# Altium PCB Pedal_WS2812_old.PcbDoc
Units mil, origin at the board's own origin, x right, y up, seen from the top; angles counter-clockwise.
Board outline 2244.09 x 2283.46 mil, 2 copper layers (Top Layer, Bottom Layer); 168 components, 0 nets, 681 pads, 0 vias.
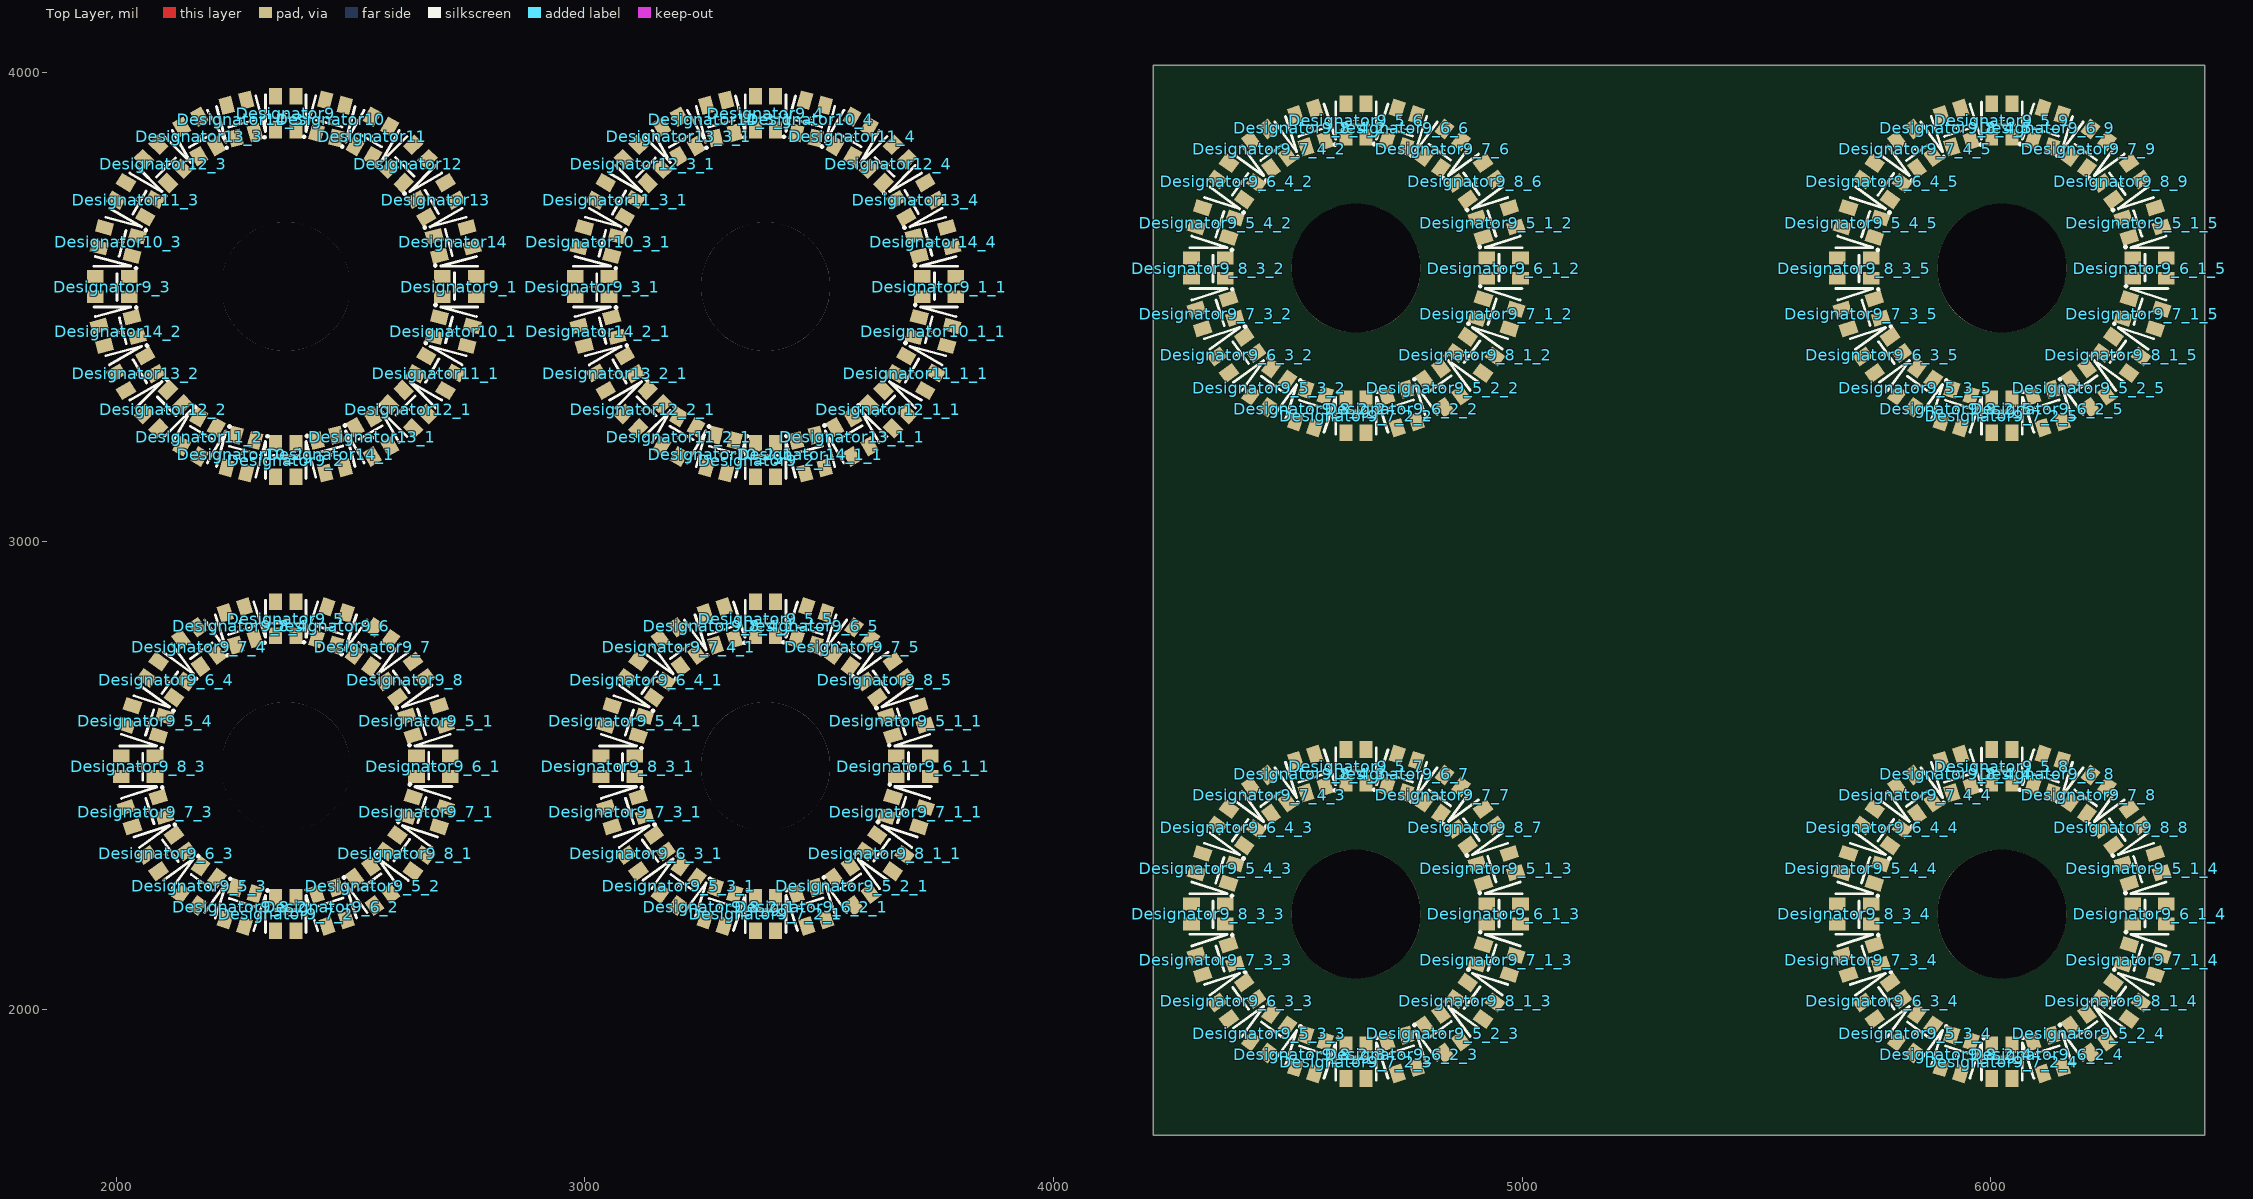
[diagram p0: Top Layer view]
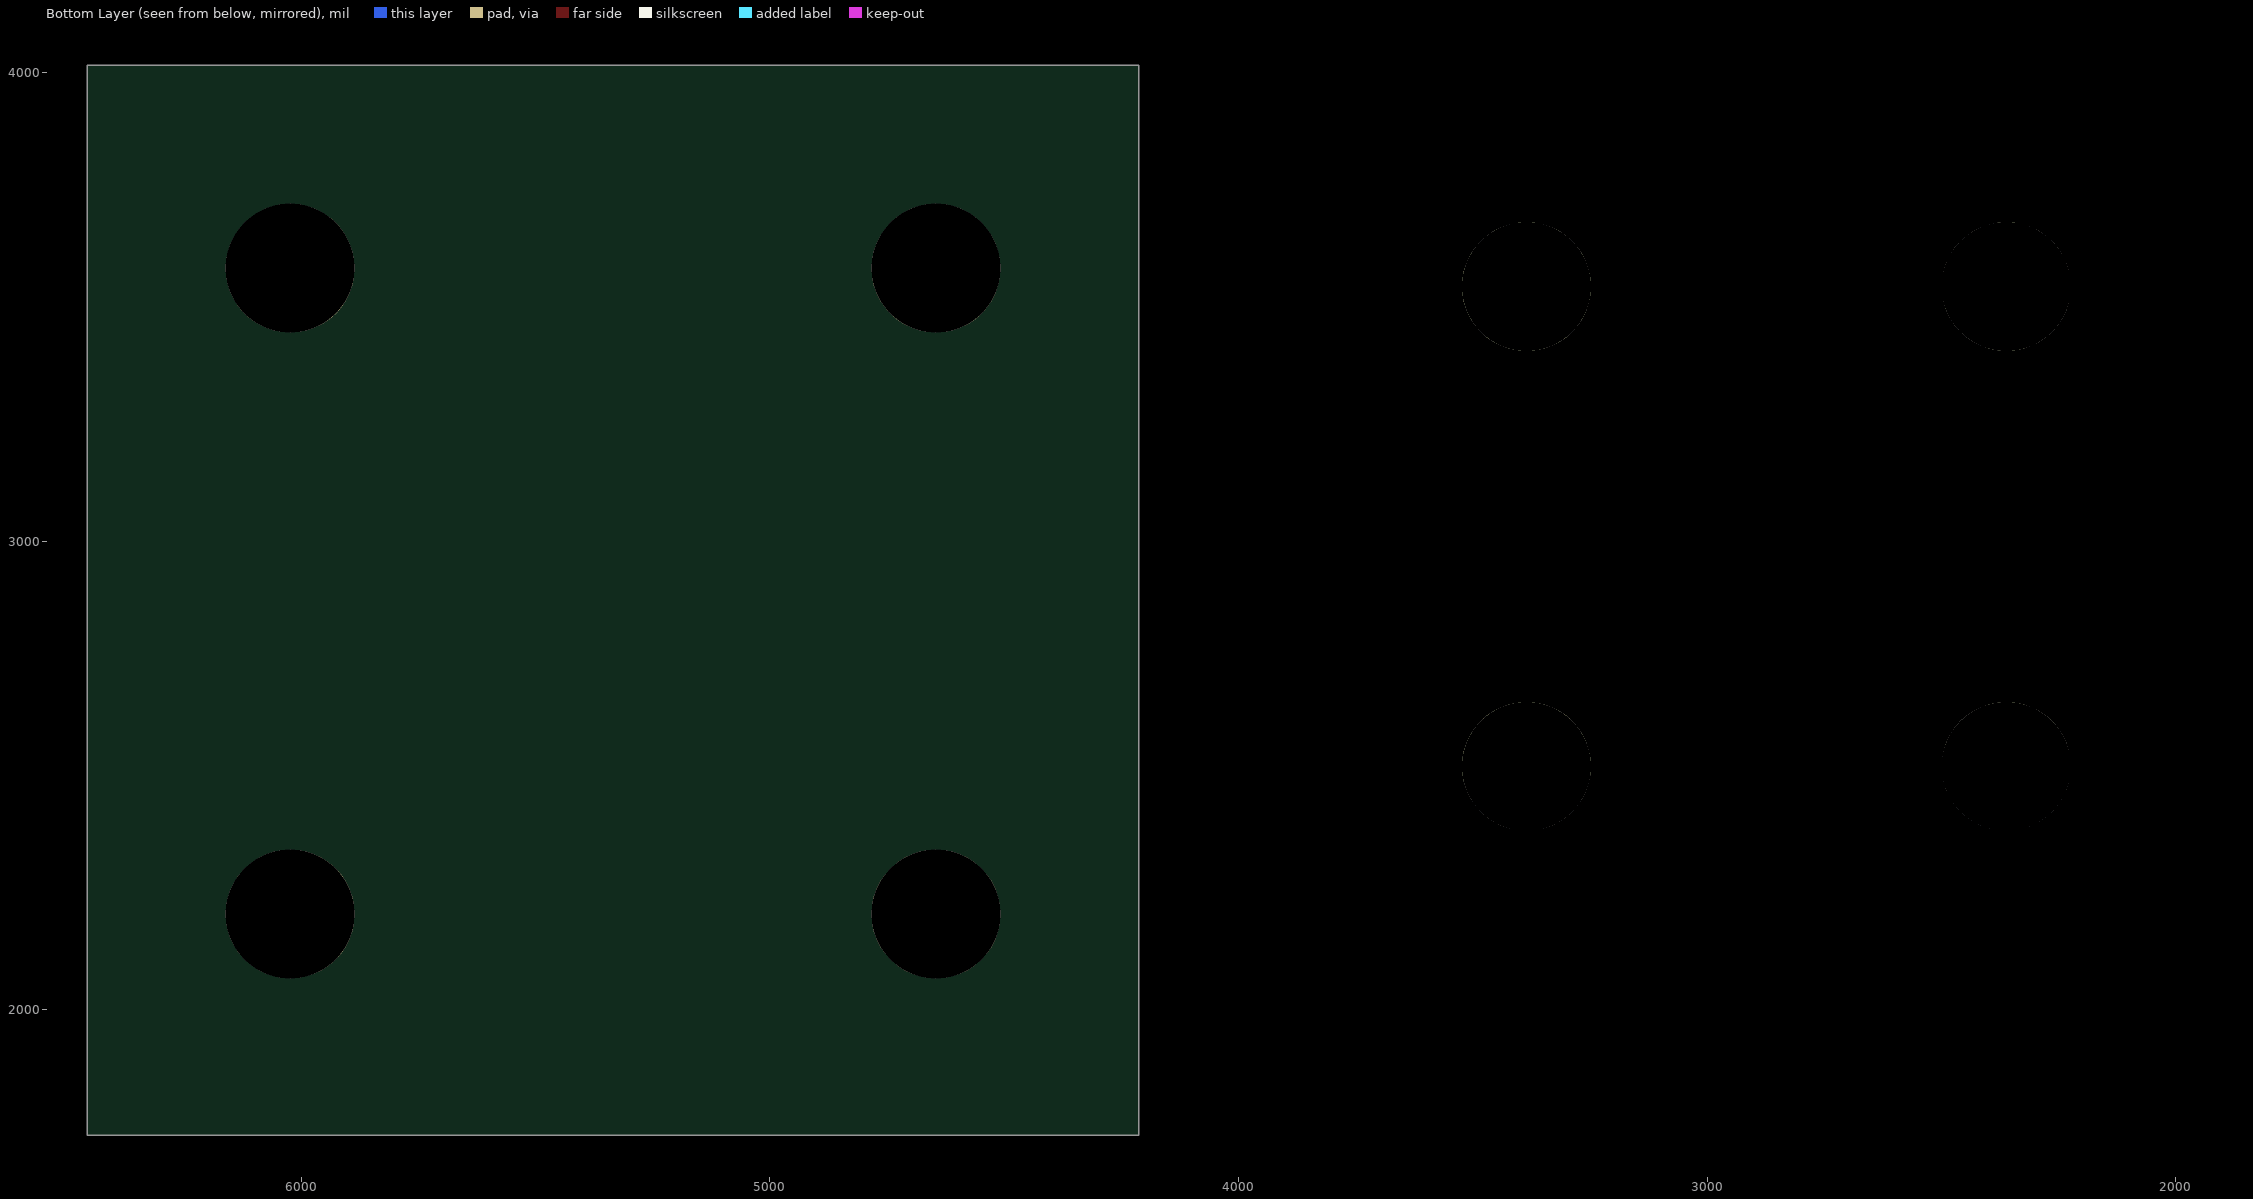
[diagram p1: Bottom Layer view, seen from below]

## Layer stack, top to bottom
Top Solder: solder mask 0.4, Solder Resist, Dk 3.5
Top Layer: signal copper 1.4
Dielectric 1: dielectric 12.6, FR-4, Dk 4.8
Bottom Layer: signal copper 1.4
Bottom Solder: solder mask 0.4, Solder Resist, Dk 3.5

## Board outline
4212.6,1732.28 4212.6,4015.75 6456.69,4015.75 6456.69,1732.28

## Design rules (kind name [scope] priority, off if disabled: settings)
Clearance [All] p1: gap=10 ignorepadtopadclearanceinfootprint=FALSE
PolygonConnect [All] p1: connectstyle=Relief reliefconductorwidth=10 reliefentries=4 polygonreliefangle="90 Angle" airgapwidth=10
RoutingVias [All] p1: holewidth=28 width=50 viastyle="Through Hole" minholewidth=28 minwidth=50 maxholewidth=28 maxwidth=50
SolderMaskExpansion [All] p1: expansion=4 istentingtop=FALSE
Width [All] p1: maxlimit=10 minlimit=10 preferedwidth=10
30 further rules are at their usual default settings.

## Components (designator, comment, footprint, x,y, rotation, side; value= is the part's Value field where it differs from the comment)
Designator9 "Comment" WS2812_2020 2362.2,3913.39 r90 top
Designator9_1 "Comment" WS2812_2020 2732.28,3543.31 r0 top
Designator9_1_1 "Comment" WS2812_2020 3755.91,3543.31 r0 top
Designator9_2 "Comment" WS2812_2020 2362.2,3173.23 r270 top
Designator9_2_1 "Comment" WS2812_2020 3385.83,3173.23 r270 top
Designator9_3 "Comment" WS2812_2020 1992.13,3543.31 r180 top
Designator9_3_1 "Comment" WS2812_2020 3015.75,3543.31 r180 top
Designator9_4 "Comment" WS2812_2020 3385.83,3913.39 r90 top
Designator9_5 "Comment" WS2812_2020 2362.2,2834.65 r90 top
Designator9_5_1 "Comment" WS2812_2020 2661.75,2617.01 r18 top
Designator9_5_1_1 "Comment" WS2812_2020 3685.37,2617.01 r18 top
Designator9_5_1_2 "Comment" WS2812_2020 4945.21,3680.01 r18 top
Designator9_5_1_3 "Comment" WS2812_2020 4945.21,2302.05 r18 top
Designator9_5_1_4 "Comment" WS2812_2020 6323.17,2302.05 r18 top
Designator9_5_1_5 "Comment" WS2812_2020 6323.17,3680.01 r18 top
Designator9_5_2 "Comment" WS2812_2020 2547.33,2264.88 r306 top
Designator9_5_2_1 "Comment" WS2812_2020 3570.96,2264.88 r306 top
Designator9_5_2_2 "Comment" WS2812_2020 4830.8,3327.87 r306 top
Designator9_5_2_3 "Comment" WS2812_2020 4830.8,1949.92 r306 top
Designator9_5_2_4 "Comment" WS2812_2020 6208.75,1949.92 r306 top
Designator9_5_2_5 "Comment" WS2812_2020 6208.75,3327.87 r306 top
Designator9_5_3 "Comment" WS2812_2020 2177.08,2264.88 r234 top
Designator9_5_3_1 "Comment" WS2812_2020 3200.7,2264.88 r234 top
Designator9_5_3_2 "Comment" WS2812_2020 4460.54,3327.87 r234 top
Designator9_5_3_3 "Comment" WS2812_2020 4460.54,1949.92 r234 top
Designator9_5_3_4 "Comment" WS2812_2020 5838.49,1949.92 r234 top
Designator9_5_3_5 "Comment" WS2812_2020 5838.49,3327.87 r234 top
Designator9_5_4 "Comment" WS2812_2020 2062.66,2617.01 r162 top
Designator9_5_4_1 "Comment" WS2812_2020 3086.28,2617.01 r162 top
Designator9_5_4_2 "Comment" WS2812_2020 4346.12,3680.01 r162 top
Designator9_5_4_3 "Comment" WS2812_2020 4346.12,2302.05 r162 top
Designator9_5_4_4 "Comment" WS2812_2020 5724.08,2302.05 r162 top
Designator9_5_4_5 "Comment" WS2812_2020 5724.08,3680.01 r162 top
Designator9_5_5 "Comment" WS2812_2020 3385.83,2834.65 r90 top
Designator9_5_6 "Comment" WS2812_2020 4645.67,3897.64 r90 top
Designator9_5_7 "Comment" WS2812_2020 4645.67,2519.68 r90 top
Designator9_5_8 "Comment" WS2812_2020 6023.62,2519.68 r90 top
Designator9_5_9 "Comment" WS2812_2020 6023.62,3897.64 r90 top
Designator9_6 "Comment" WS2812_2020 2459.53,2819.23 r72 top
Designator9_6_1 "Comment" WS2812_2020 2677.17,2519.68 r0 top
Designator9_6_1_1 "Comment" WS2812_2020 3700.79,2519.68 r0 top
Designator9_6_1_2 "Comment" WS2812_2020 4960.63,3582.68 r0 top
Designator9_6_1_3 "Comment" WS2812_2020 4960.63,2204.72 r0 top
Designator9_6_1_4 "Comment" WS2812_2020 6338.58,2204.72 r0 top
Designator9_6_1_5 "Comment" WS2812_2020 6338.58,3582.68 r0 top
Designator9_6_2 "Comment" WS2812_2020 2459.53,2220.14 r288 top
Designator9_6_2_1 "Comment" WS2812_2020 3483.15,2220.14 r288 top
Designator9_6_2_2 "Comment" WS2812_2020 4743,3283.13 r288 top
Designator9_6_2_3 "Comment" WS2812_2020 4743,1905.18 r288 top
Designator9_6_2_4 "Comment" WS2812_2020 6120.95,1905.18 r288 top
Designator9_6_2_5 "Comment" WS2812_2020 6120.95,3283.13 r288 top
Designator9_6_3 "Comment" WS2812_2020 2107.4,2334.56 r216 top
Designator9_6_3_1 "Comment" WS2812_2020 3131.02,2334.56 r216 top
Designator9_6_3_2 "Comment" WS2812_2020 4390.86,3397.55 r216 top
Designator9_6_3_3 "Comment" WS2812_2020 4390.86,2019.6 r216 top
Designator9_6_3_4 "Comment" WS2812_2020 5768.81,2019.6 r216 top
Designator9_6_3_5 "Comment" WS2812_2020 5768.81,3397.55 r216 top
Designator9_6_4 "Comment" WS2812_2020 2107.4,2704.81 r144 top
Designator9_6_4_1 "Comment" WS2812_2020 3131.02,2704.81 r144 top
Designator9_6_4_2 "Comment" WS2812_2020 4390.86,3767.81 r144 top
Designator9_6_4_3 "Comment" WS2812_2020 4390.86,2389.85 r144 top
Designator9_6_4_4 "Comment" WS2812_2020 5768.81,2389.85 r144 top
Designator9_6_4_5 "Comment" WS2812_2020 5768.81,3767.81 r144 top
Designator9_6_5 "Comment" WS2812_2020 3483.16,2819.23 r72 top
Designator9_6_6 "Comment" WS2812_2020 4743,3882.22 r72 top
Designator9_6_7 "Comment" WS2812_2020 4743,2504.27 r72 top
Designator9_6_8 "Comment" WS2812_2020 6120.95,2504.27 r72 top
Designator9_6_9 "Comment" WS2812_2020 6120.95,3882.22 r72 top
Designator9_7 "Comment" WS2812_2020 2547.33,2774.49 r54 top
Designator9_7_1 "Comment" WS2812_2020 2661.75,2422.36 r342 top
Designator9_7_1_1 "Comment" WS2812_2020 3685.37,2422.36 r342 top
Designator9_7_1_2 "Comment" WS2812_2020 4945.21,3485.35 r342 top
Designator9_7_1_3 "Comment" WS2812_2020 4945.21,2107.4 r342 top
Designator9_7_1_4 "Comment" WS2812_2020 6323.17,2107.4 r342 top
Designator9_7_1_5 "Comment" WS2812_2020 6323.17,3485.35 r342 top
Designator9_7_2 "Comment" WS2812_2020 2362.2,2204.72 r270 top
Designator9_7_2_1 "Comment" WS2812_2020 3385.83,2204.72 r270 top
Designator9_7_2_2 "Comment" WS2812_2020 4645.67,3267.72 r270 top
Designator9_7_2_3 "Comment" WS2812_2020 4645.67,1889.76 r270 top
Designator9_7_2_4 "Comment" WS2812_2020 6023.62,1889.76 r270 top
Designator9_7_2_5 "Comment" WS2812_2020 6023.62,3267.72 r270 top
Designator9_7_3 "Comment" WS2812_2020 2062.66,2422.36 r198 top
Designator9_7_3_1 "Comment" WS2812_2020 3086.28,2422.36 r198 top
Designator9_7_3_2 "Comment" WS2812_2020 4346.12,3485.35 r198 top
Designator9_7_3_3 "Comment" WS2812_2020 4346.12,2107.4 r198 top
Designator9_7_3_4 "Comment" WS2812_2020 5724.08,2107.4 r198 top
Designator9_7_3_5 "Comment" WS2812_2020 5724.08,3485.35 r198 top
Designator9_7_4 "Comment" WS2812_2020 2177.08,2774.49 r126 top
Designator9_7_4_1 "Comment" WS2812_2020 3200.7,2774.49 r126 top
Designator9_7_4_2 "Comment" WS2812_2020 4460.54,3837.49 r126 top
Designator9_7_4_3 "Comment" WS2812_2020 4460.54,2459.53 r126 top
Designator9_7_4_4 "Comment" WS2812_2020 5838.49,2459.53 r126 top
Designator9_7_4_5 "Comment" WS2812_2020 5838.49,3837.49 r126 top
Designator9_7_5 "Comment" WS2812_2020 3570.96,2774.49 r54 top
Designator9_7_6 "Comment" WS2812_2020 4830.8,3837.49 r54 top
Designator9_7_7 "Comment" WS2812_2020 4830.8,2459.53 r54 top
Designator9_7_8 "Comment" WS2812_2020 6208.75,2459.53 r54 top
Designator9_7_9 "Comment" WS2812_2020 6208.75,3837.49 r54 top
Designator9_8 "Comment" WS2812_2020 2617.01,2704.81 r36 top
Designator9_8_1 "Comment" WS2812_2020 2617.01,2334.56 r324 top
Designator9_8_1_1 "Comment" WS2812_2020 3640.64,2334.56 r324 top
Designator9_8_1_2 "Comment" WS2812_2020 4900.48,3397.55 r324 top
Designator9_8_1_3 "Comment" WS2812_2020 4900.48,2019.6 r324 top
Designator9_8_1_4 "Comment" WS2812_2020 6278.43,2019.6 r324 top
Designator9_8_1_5 "Comment" WS2812_2020 6278.43,3397.55 r324 top
Designator9_8_2 "Comment" WS2812_2020 2264.88,2220.14 r252 top
Designator9_8_2_1 "Comment" WS2812_2020 3288.5,2220.14 r252 top
Designator9_8_2_2 "Comment" WS2812_2020 4548.34,3283.13 r252 top
Designator9_8_2_3 "Comment" WS2812_2020 4548.34,1905.18 r252 top
Designator9_8_2_4 "Comment" WS2812_2020 5926.29,1905.18 r252 top
Designator9_8_2_5 "Comment" WS2812_2020 5926.29,3283.13 r252 top
Designator9_8_3 "Comment" WS2812_2020 2047.24,2519.68 r180 top
Designator9_8_3_1 "Comment" WS2812_2020 3070.87,2519.68 r180 top
Designator9_8_3_2 "Comment" WS2812_2020 4330.71,3582.68 r180 top
Designator9_8_3_3 "Comment" WS2812_2020 4330.71,2204.72 r180 top
Designator9_8_3_4 "Comment" WS2812_2020 5708.66,2204.72 r180 top
Designator9_8_3_5 "Comment" WS2812_2020 5708.66,3582.68 r180 top
Designator9_8_4 "Comment" WS2812_2020 2264.88,2819.23 r108 top
Designator9_8_4_1 "Comment" WS2812_2020 3288.5,2819.23 r108 top
Designator9_8_4_2 "Comment" WS2812_2020 4548.34,3882.22 r108 top
Designator9_8_4_3 "Comment" WS2812_2020 4548.34,2504.27 r108 top
Designator9_8_4_4 "Comment" WS2812_2020 5926.29,2504.27 r108 top
Designator9_8_4_5 "Comment" WS2812_2020 5926.29,3882.22 r108 top
Designator9_8_5 "Comment" WS2812_2020 3640.64,2704.81 r36 top
Designator9_8_6 "Comment" WS2812_2020 4900.48,3767.81 r36 top
Designator9_8_7 "Comment" WS2812_2020 4900.48,2389.85 r36 top
Designator9_8_8 "Comment" WS2812_2020 6278.43,2389.85 r36 top
Designator9_8_9 "Comment" WS2812_2020 6278.43,3767.81 r36 top
Designator10 "Comment" WS2812_2020 2457.97,3900.7 r75 top
Designator10_1 "Comment" WS2812_2020 2719.6,3447.54 r345 top
Designator10_1_1 "Comment" WS2812_2020 3743.22,3447.54 r345 top
Designator10_2 "Comment" WS2812_2020 2266.44,3185.91 r255 top
Designator10_2_1 "Comment" WS2812_2020 3290.06,3185.91 r255 top
Designator10_3 "Comment" WS2812_2020 2004.81,3639.07 r165 top
Designator10_3_1 "Comment" WS2812_2020 3028.43,3639.07 r165 top
Designator10_4 "Comment" WS2812_2020 3481.59,3900.7 r75 top
Designator11 "Comment" WS2812_2020 2547.2,3863.74 r60 top
Designator11_1 "Comment" WS2812_2020 2682.63,3358.31 r330 top
Designator11_1_1 "Comment" WS2812_2020 3706.26,3358.31 r330 top
Designator11_2 "Comment" WS2812_2020 2177.2,3222.88 r240 top
Designator11_2_1 "Comment" WS2812_2020 3200.83,3222.88 r240 top
Designator11_3 "Comment" WS2812_2020 2041.78,3728.31 r150 top
Designator11_3_1 "Comment" WS2812_2020 3065.4,3728.31 r150 top
Designator11_4 "Comment" WS2812_2020 3570.83,3863.74 r60 top
Designator12 "Comment" WS2812_2020 2623.83,3804.94 r45 top
Designator12_1 "Comment" WS2812_2020 2623.83,3281.68 r315 top
Designator12_1_1 "Comment" WS2812_2020 3647.46,3281.68 r315 top
Designator12_2 "Comment" WS2812_2020 2100.58,3281.68 r225 top
Designator12_2_1 "Comment" WS2812_2020 3124.2,3281.68 r225 top
Designator12_3 "Comment" WS2812_2020 2100.58,3804.94 r135 top
Designator12_3_1 "Comment" WS2812_2020 3124.2,3804.94 r135 top
Designator12_4 "Comment" WS2812_2020 3647.46,3804.94 r45 top
Designator13 "Comment" WS2812_2020 2682.63,3728.31 r30 top
Designator13_1 "Comment" WS2812_2020 2547.2,3222.88 r300 top
Designator13_1_1 "Comment" WS2812_2020 3570.83,3222.88 r300 top
Designator13_2 "Comment" WS2812_2020 2041.78,3358.31 r210 top
Designator13_2_1 "Comment" WS2812_2020 3065.4,3358.31 r210 top
Designator13_3 "Comment" WS2812_2020 2177.2,3863.74 r120 top
Designator13_3_1 "Comment" WS2812_2020 3200.83,3863.74 r120 top
Designator13_4 "Comment" WS2812_2020 3706.26,3728.31 r30 top
Designator14 "Comment" WS2812_2020 2719.6,3639.07 r15 top
Designator14_1 "Comment" WS2812_2020 2457.97,3185.91 r285 top
Designator14_1_1 "Comment" WS2812_2020 3481.59,3185.91 r285 top
Designator14_2 "Comment" WS2812_2020 2004.81,3447.54 r195 top
Designator14_2_1 "Comment" WS2812_2020 3028.43,3447.54 r195 top
Designator14_3 "Comment" WS2812_2020 2266.44,3900.7 r105 top
Designator14_3_1 "Comment" WS2812_2020 3290.06,3900.7 r105 top
Designator14_4 "Comment" WS2812_2020 3743.22,3639.07 r15 top

## Footprints (in the part's own frame and the unit in brackets; to place one, negate y for a bottom-side part, rotate by r counter-clockwise, add the part's x,y. Pads: shape width x height; smd on the part's side, far side on the other; paste and mask are expansions set on the pad)
WS2812_2020 [mm]
  rect 0.9x0.7 smd: 1(-0.915,0.55) 2(-0.915,-0.55) 3(0.915,-0.55) 4(0.915,0.55)
  silkscreen extent -1.3,-1.1 1,1.15, body extent -1.09,-0.98 1.11,1.02, height 0.86

## Free pads (board coordinates)
  round 275 hole 275.59 mask+2.36: NC(2362.2,2519.68) NC(2362.2,3543.31) NC(3385.83,2519.68) NC(3385.83,3543.31) NC(3385.83,3543.31) NC(4645.67,2204.72) NC(4645.67,3582.68) NC(6023.62,3582.68) NC(6023.62,2204.72)

## Nets (pads, with @x,y where several pads share a name; then routed paths per layer and width w, separated by ;. In a path a pad name is that pad's centre, name@x,y a point inside that pad or via, vN(x,y) a via of type N, cw(c..) or ccw(c..) an arc to the next point about the centre after c; other vN are vias at no path point)
pads on no net: Designator9.1 Designator9.2 Designator9.3 Designator9.4 Designator9_1.1 Designator9_1.2 Designator9_1.3 Designator9_1.4 Designator9_1_1.1 Designator9_1_1.2 Designator9_1_1.3 Designator9_1_1.4 Designator9_2.1 Designator9_2.2 Designator9_2.3 Designator9_2.4 Designator9_2_1.1 Designator9_2_1.2 Designator9_2_1.3 Designator9_2_1.4 Designator9_3.1 Designator9_3.2 Designator9_3.3 Designator9_3.4 Designator9_3_1.1 Designator9_3_1.2 Designator9_3_1.3 Designator9_3_1.4 Designator9_4.1 Designator9_4.2 Designator9_4.3 Designator9_4.4 Designator9_5.1 Designator9_5.2 Designator9_5.3 Designator9_5.4 Designator9_5_1.1 Designator9_5_1.2 Designator9_5_1.3 Designator9_5_1.4 Designator9_5_1_1.1 Designator9_5_1_1.2 Designator9_5_1_1.3 Designator9_5_1_1.4 Designator9_5_1_2.1 Designator9_5_1_2.2 Designator9_5_1_2.3 Designator9_5_1_2.4 Designator9_5_1_3.1 Designator9_5_1_3.2 Designator9_5_1_3.3 Designator9_5_1_3.4 Designator9_5_1_4.1 Designator9_5_1_4.2 Designator9_5_1_4.3 Designator9_5_1_4.4 Designator9_5_1_5.1 Designator9_5_1_5.2 Designator9_5_1_5.3 Designator9_5_1_5.4 Designator9_5_2.1 Designator9_5_2.2 Designator9_5_2.3 Designator9_5_2.4 Designator9_5_2_1.1 Designator9_5_2_1.2 Designator9_5_2_1.3 Designator9_5_2_1.4 Designator9_5_2_2.1 Designator9_5_2_2.2 Designator9_5_2_2.3 Designator9_5_2_2.4 Designator9_5_2_3.1 Designator9_5_2_3.2 Designator9_5_2_3.3 Designator9_5_2_3.4 Designator9_5_2_4.1 Designator9_5_2_4.2 Designator9_5_2_4.3 Designator9_5_2_4.4 Designator9_5_2_5.1 Designator9_5_2_5.2 Designator9_5_2_5.3 Designator9_5_2_5.4 Designator9_5_3.1 Designator9_5_3.2 Designator9_5_3.3 Designator9_5_3.4 Designator9_5_3_1.1 Designator9_5_3_1.2 Designator9_5_3_1.3 Designator9_5_3_1.4 Designator9_5_3_2.1 Designator9_5_3_2.2 Designator9_5_3_2.3 Designator9_5_3_2.4 Designator9_5_3_3.1 Designator9_5_3_3.2 Designator9_5_3_3.3 Designator9_5_3_3.4 Designator9_5_3_4.1 Designator9_5_3_4.2 Designator9_5_3_4.3 Designator9_5_3_4.4 Designator9_5_3_5.1 Designator9_5_3_5.2 Designator9_5_3_5.3 Designator9_5_3_5.4 Designator9_5_4.1 Designator9_5_4.2 Designator9_5_4.3 Designator9_5_4.4 Designator9_5_4_1.1 Designator9_5_4_1.2 Designator9_5_4_1.3 Designator9_5_4_1.4 Designator9_5_4_2.1 Designator9_5_4_2.2 Designator9_5_4_2.3 Designator9_5_4_2.4 Designator9_5_4_3.1 Designator9_5_4_3.2 Designator9_5_4_3.3 Designator9_5_4_3.4 Designator9_5_4_4.1 Designator9_5_4_4.2 Designator9_5_4_4.3 Designator9_5_4_4.4 Designator9_5_4_5.1 Designator9_5_4_5.2 Designator9_5_4_5.3 Designator9_5_4_5.4 Designator9_5_5.1 Designator9_5_5.2 Designator9_5_5.3 Designator9_5_5.4 Designator9_5_6.1 Designator9_5_6.2 Designator9_5_6.3 Designator9_5_6.4 Designator9_5_7.1 Designator9_5_7.2 Designator9_5_7.3 Designator9_5_7.4 Designator9_5_8.1 Designator9_5_8.2 Designator9_5_8.3 Designator9_5_8.4 Designator9_5_9.1 Designator9_5_9.2 Designator9_5_9.3 Designator9_5_9.4 Designator9_6.1 Designator9_6.2 Designator9_6.3 Designator9_6.4 Designator9_6_1.1 Designator9_6_1.2 Designator9_6_1.3 Designator9_6_1.4 Designator9_6_1_1.1 Designator9_6_1_1.2 Designator9_6_1_1.3 Designator9_6_1_1.4 Designator9_6_1_2.1 Designator9_6_1_2.2 Designator9_6_1_2.3 Designator9_6_1_2.4 Designator9_6_1_3.1 Designator9_6_1_3.2 Designator9_6_1_3.3 Designator9_6_1_3.4 Designator9_6_1_4.1 Designator9_6_1_4.2 Designator9_6_1_4.3 Designator9_6_1_4.4 Designator9_6_1_5.1 Designator9_6_1_5.2 Designator9_6_1_5.3 Designator9_6_1_5.4 Designator9_6_2.1 Designator9_6_2.2 Designator9_6_2.3 Designator9_6_2.4 Designator9_6_2_1.1 Designator9_6_2_1.2 Designator9_6_2_1.3 Designator9_6_2_1.4 Designator9_6_2_2.1 Designator9_6_2_2.2 Designator9_6_2_2.3 Designator9_6_2_2.4 Designator9_6_2_3.1 Designator9_6_2_3.2 Designator9_6_2_3.3 Designator9_6_2_3.4 Designator9_6_2_4.1 Designator9_6_2_4.2 Designator9_6_2_4.3 Designator9_6_2_4.4 Designator9_6_2_5.1 Designator9_6_2_5.2 Designator9_6_2_5.3 Designator9_6_2_5.4 Designator9_6_3.1 Designator9_6_3.2 Designator9_6_3.3 Designator9_6_3.4 Designator9_6_3_1.1 Designator9_6_3_1.2 Designator9_6_3_1.3 Designator9_6_3_1.4 Designator9_6_3_2.1 Designator9_6_3_2.2 Designator9_6_3_2.3 Designator9_6_3_2.4 Designator9_6_3_3.1 Designator9_6_3_3.2 Designator9_6_3_3.3 Designator9_6_3_3.4 Designator9_6_3_4.1 Designator9_6_3_4.2 Designator9_6_3_4.3 Designator9_6_3_4.4 Designator9_6_3_5.1 Designator9_6_3_5.2 Designator9_6_3_5.3 Designator9_6_3_5.4 Designator9_6_4.1 Designator9_6_4.2 Designator9_6_4.3 Designator9_6_4.4 Designator9_6_4_1.1 Designator9_6_4_1.2 Designator9_6_4_1.3 Designator9_6_4_1.4 Designator9_6_4_2.1 Designator9_6_4_2.2 Designator9_6_4_2.3 Designator9_6_4_2.4 Designator9_6_4_3.1 Designator9_6_4_3.2 Designator9_6_4_3.3 Designator9_6_4_3.4 Designator9_6_4_4.1 Designator9_6_4_4.2 Designator9_6_4_4.3 Designator9_6_4_4.4 Designator9_6_4_5.1 Designator9_6_4_5.2 Designator9_6_4_5.3 Designator9_6_4_5.4 Designator9_6_5.1 Designator9_6_5.2 Designator9_6_5.3 Designator9_6_5.4 Designator9_6_6.1 Designator9_6_6.2 Designator9_6_6.3 Designator9_6_6.4 Designator9_6_7.1 Designator9_6_7.2 Designator9_6_7.3 Designator9_6_7.4 Designator9_6_8.1 Designator9_6_8.2 Designator9_6_8.3 Designator9_6_8.4 Designator9_6_9.1 Designator9_6_9.2 Designator9_6_9.3 Designator9_6_9.4 Designator9_7.1 Designator9_7.2 Designator9_7.3 Designator9_7.4 Designator9_7_1.1 Designator9_7_1.2 Designator9_7_1.3 Designator9_7_1.4 Designator9_7_1_1.1 Designator9_7_1_1.2 Designator9_7_1_1.3 Designator9_7_1_1.4 Designator9_7_1_2.1 Designator9_7_1_2.2 Designator9_7_1_2.3 Designator9_7_1_2.4 Designator9_7_1_3.1 Designator9_7_1_3.2 Designator9_7_1_3.3 Designator9_7_1_3.4 Designator9_7_1_4.1 Designator9_7_1_4.2 Designator9_7_1_4.3 Designator9_7_1_4.4 Designator9_7_1_5.1 Designator9_7_1_5.2 Designator9_7_1_5.3 Designator9_7_1_5.4 Designator9_7_2.1 Designator9_7_2.2 Designator9_7_2.3 Designator9_7_2.4 Designator9_7_2_1.1 Designator9_7_2_1.2 Designator9_7_2_1.3 Designator9_7_2_1.4 Designator9_7_2_2.1 Designator9_7_2_2.2 Designator9_7_2_2.3 Designator9_7_2_2.4 Designator9_7_2_3.1 Designator9_7_2_3.2 Designator9_7_2_3.3 Designator9_7_2_3.4 Designator9_7_2_4.1 Designator9_7_2_4.2 Designator9_7_2_4.3 Designator9_7_2_4.4 Designator9_7_2_5.1 Designator9_7_2_5.2 Designator9_7_2_5.3 Designator9_7_2_5.4 Designator9_7_3.1 Designator9_7_3.2 Designator9_7_3.3 Designator9_7_3.4 Designator9_7_3_1.1 Designator9_7_3_1.2 Designator9_7_3_1.3 Designator9_7_3_1.4 Designator9_7_3_2.1 Designator9_7_3_2.2 Designator9_7_3_2.3 Designator9_7_3_2.4 Designator9_7_3_3.1 Designator9_7_3_3.2 Designator9_7_3_3.3 Designator9_7_3_3.4 Designator9_7_3_4.1 Designator9_7_3_4.2 Designator9_7_3_4.3 Designator9_7_3_4.4 Designator9_7_3_5.1 Designator9_7_3_5.2 Designator9_7_3_5.3 Designator9_7_3_5.4 Designator9_7_4.1 Designator9_7_4.2 Designator9_7_4.3 Designator9_7_4.4 Designator9_7_4_1.1 Designator9_7_4_1.2 Designator9_7_4_1.3 Designator9_7_4_1.4 Designator9_7_4_2.1 Designator9_7_4_2.2 Designator9_7_4_2.3 Designator9_7_4_2.4 Designator9_7_4_3.1 Designator9_7_4_3.2 Designator9_7_4_3.3 Designator9_7_4_3.4 Designator9_7_4_4.1 Designator9_7_4_4.2 Designator9_7_4_4.3 Designator9_7_4_4.4 Designator9_7_4_5.1 Designator9_7_4_5.2 Designator9_7_4_5.3 Designator9_7_4_5.4 Designator9_7_5.1 Designator9_7_5.2 Designator9_7_5.3 Designator9_7_5.4 Designator9_7_6.1 Designator9_7_6.2 Designator9_7_6.3 Designator9_7_6.4 Designator9_7_7.1 Designator9_7_7.2 Designator9_7_7.3 Designator9_7_7.4 Designator9_7_8.1 Designator9_7_8.2 Designator9_7_8.3 Designator9_7_8.4 Designator9_7_9.1 Designator9_7_9.2 Designator9_7_9.3 Designator9_7_9.4 Designator9_8.1 Designator9_8.2 Designator9_8.3 Designator9_8.4 Designator9_8_1.1 Designator9_8_1.2 Designator9_8_1.3 Designator9_8_1.4 Designator9_8_1_1.1 Designator9_8_1_1.2 Designator9_8_1_1.3 Designator9_8_1_1.4 Designator9_8_1_2.1 Designator9_8_1_2.2 Designator9_8_1_2.3 Designator9_8_1_2.4 Designator9_8_1_3.1 Designator9_8_1_3.2 Designator9_8_1_3.3 Designator9_8_1_3.4 Designator9_8_1_4.1 Designator9_8_1_4.2 Designator9_8_1_4.3 Designator9_8_1_4.4 Designator9_8_1_5.1 Designator9_8_1_5.2 Designator9_8_1_5.3 Designator9_8_1_5.4 Designator9_8_2.1 Designator9_8_2.2 Designator9_8_2.3 Designator9_8_2.4 Designator9_8_2_1.1 Designator9_8_2_1.2 Designator9_8_2_1.3 Designator9_8_2_1.4 Designator9_8_2_2.1 Designator9_8_2_2.2 Designator9_8_2_2.3 Designator9_8_2_2.4 Designator9_8_2_3.1 Designator9_8_2_3.2 Designator9_8_2_3.3 Designator9_8_2_3.4 Designator9_8_2_4.1 Designator9_8_2_4.2 Designator9_8_2_4.3 Designator9_8_2_4.4 Designator9_8_2_5.1 Designator9_8_2_5.2 Designator9_8_2_5.3 Designator9_8_2_5.4 Designator9_8_3.1 Designator9_8_3.2 Designator9_8_3.3 Designator9_8_3.4 Designator9_8_3_1.1 Designator9_8_3_1.2 Designator9_8_3_1.3 Designator9_8_3_1.4 Designator9_8_3_2.1 Designator9_8_3_2.2 Designator9_8_3_2.3 Designator9_8_3_2.4 Designator9_8_3_3.1 Designator9_8_3_3.2 Designator9_8_3_3.3 Designator9_8_3_3.4 Designator9_8_3_4.1 Designator9_8_3_4.2 Designator9_8_3_4.3 Designator9_8_3_4.4 Designator9_8_3_5.1 Designator9_8_3_5.2 Designator9_8_3_5.3 Designator9_8_3_5.4 Designator9_8_4.1 Designator9_8_4.2 Designator9_8_4.3 Designator9_8_4.4 Designator9_8_4_1.1 Designator9_8_4_1.2 Designator9_8_4_1.3 Designator9_8_4_1.4 Designator9_8_4_2.1 Designator9_8_4_2.2 Designator9_8_4_2.3 Designator9_8_4_2.4 Designator9_8_4_3.1 Designator9_8_4_3.2 Designator9_8_4_3.3 Designator9_8_4_3.4 Designator9_8_4_4.1 Designator9_8_4_4.2 Designator9_8_4_4.3 Designator9_8_4_4.4 Designator9_8_4_5.1 Designator9_8_4_5.2 Designator9_8_4_5.3 Designator9_8_4_5.4 Designator9_8_5.1 Designator9_8_5.2 Designator9_8_5.3 Designator9_8_5.4 Designator9_8_6.1 Designator9_8_6.2 Designator9_8_6.3 Designator9_8_6.4 Designator9_8_7.1 Designator9_8_7.2 Designator9_8_7.3 Designator9_8_7.4 Designator9_8_8.1 Designator9_8_8.2 Designator9_8_8.3 Designator9_8_8.4 Designator9_8_9.1 Designator9_8_9.2 Designator9_8_9.3 Designator9_8_9.4 Designator10.1 Designator10.2 Designator10.3 Designator10.4 Designator10_1.1 Designator10_1.2 Designator10_1.3 Designator10_1.4 Designator10_1_1.1 Designator10_1_1.2 Designator10_1_1.3 Designator10_1_1.4 Designator10_2.1 Designator10_2.2 Designator10_2.3 Designator10_2.4 Designator10_2_1.1 Designator10_2_1.2 Designator10_2_1.3 Designator10_2_1.4 Designator10_3.1 Designator10_3.2 Designator10_3.3 Designator10_3.4 Designator10_3_1.1 Designator10_3_1.2 Designator10_3_1.3 Designator10_3_1.4 Designator10_4.1 Designator10_4.2 Designator10_4.3 Designator10_4.4 Designator11.1 Designator11.2 Designator11.3 Designator11.4 Designator11_1.1 Designator11_1.2 Designator11_1.3 Designator11_1.4 Designator11_1_1.1 Designator11_1_1.2 Designator11_1_1.3 Designator11_1_1.4 Designator11_2.1 Designator11_2.2 Designator11_2.3 Designator11_2.4 Designator11_2_1.1 Designator11_2_1.2 Designator11_2_1.3 Designator11_2_1.4 Designator11_3.1 Designator11_3.2 Designator11_3.3 Designator11_3.4 Designator11_3_1.1 Designator11_3_1.2 Designator11_3_1.3 Designator11_3_1.4 Designator11_4.1 Designator11_4.2 Designator11_4.3 Designator11_4.4 Designator12.1 Designator12.2 Designator12.3 Designator12.4 Designator12_1.1 Designator12_1.2 Designator12_1.3 Designator12_1.4 Designator12_1_1.1 Designator12_1_1.2 Designator12_1_1.3 Designator12_1_1.4 Designator12_2.1 Designator12_2.2 Designator12_2.3 Designator12_2.4 Designator12_2_1.1 Designator12_2_1.2 Designator12_2_1.3 Designator12_2_1.4 Designator12_3.1 Designator12_3.2 Designator12_3.3 Designator12_3.4 Designator12_3_1.1 Designator12_3_1.2 Designator12_3_1.3 Designator12_3_1.4 Designator12_4.1 Designator12_4.2 Designator12_4.3 Designator12_4.4 Designator13.1 Designator13.2 Designator13.3 Designator13.4 Designator13_1.1 Designator13_1.2 Designator13_1.3 Designator13_1.4 Designator13_1_1.1 Designator13_1_1.2 Designator13_1_1.3 Designator13_1_1.4 Designator13_2.1 Designator13_2.2 Designator13_2.3 Designator13_2.4 Designator13_2_1.1 Designator13_2_1.2 Designator13_2_1.3 Designator13_2_1.4 Designator13_3.1 Designator13_3.2 Designator13_3.3 Designator13_3.4 Designator13_3_1.1 Designator13_3_1.2 Designator13_3_1.3 Designator13_3_1.4 Designator13_4.1 Designator13_4.2 Designator13_4.3 Designator13_4.4 Designator14.1 Designator14.2 Designator14.3 Designator14.4 Designator14_1.1 Designator14_1.2 Designator14_1.3 Designator14_1.4 Designator14_1_1.1 Designator14_1_1.2 Designator14_1_1.3 Designator14_1_1.4 Designator14_2.1 Designator14_2.2 Designator14_2.3 Designator14_2.4 Designator14_2_1.1 Designator14_2_1.2 Designator14_2_1.3 Designator14_2_1.4 Designator14_3.1 Designator14_3.2 Designator14_3.3 Designator14_3.4 Designator14_3_1.1 Designator14_3_1.2 Designator14_3_1.3 Designator14_3_1.4 Designator14_4.1 Designator14_4.2 Designator14_4.3 Designator14_4.4

## Silkscreen, mask and mechanical layers (free items; w line width, h text height)
Board Shape:
  circle w10: c4645.67,3582.68 r59.06
  circle w10: c4645.67,2204.72 r59.06
  circle w10: c6023.62,2204.72 r59.06
  circle w10: c6023.62,3582.68 r59.06
  lines w1: 4212.6,1732.28 6456.69,1732.28 6456.69,4015.75 4212.6,4015.75 4212.6,1732.28
Mechanical 4:
  drawing of 414 lines, arcs and shapes, not listed